# Altium PCB PCB1.PcbDoc
Units mm, origin at the board's own origin, x right, y up, seen from the top; angles counter-clockwise.
Board outline 220 x 90 mm, 2 copper layers (Top Layer, Bottom Layer); 97 components, 216 nets, 528 pads, 0 vias.
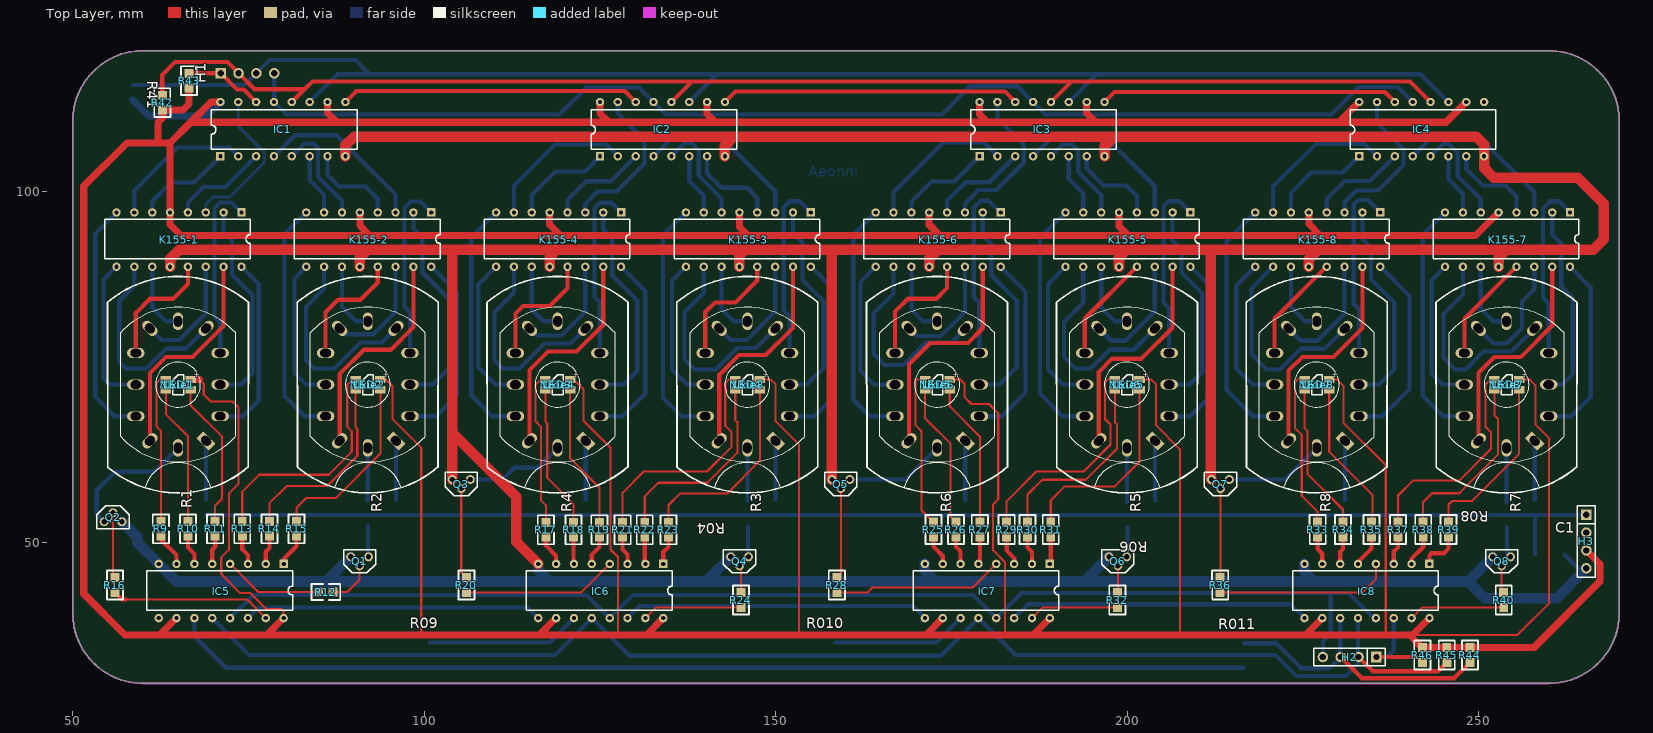
[diagram p0: Top Layer view]
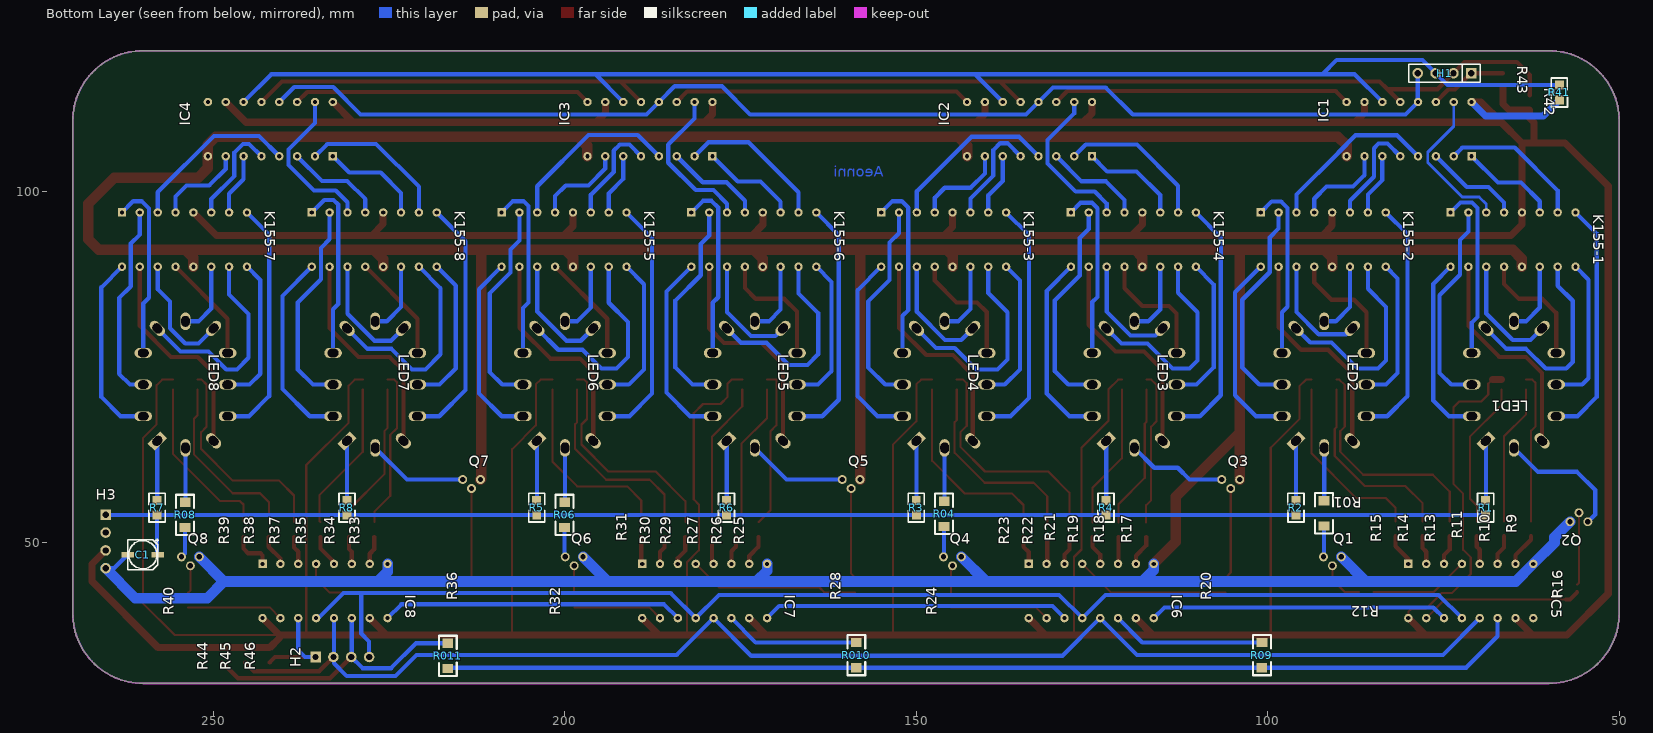
[diagram p1: Bottom Layer view, seen from below]
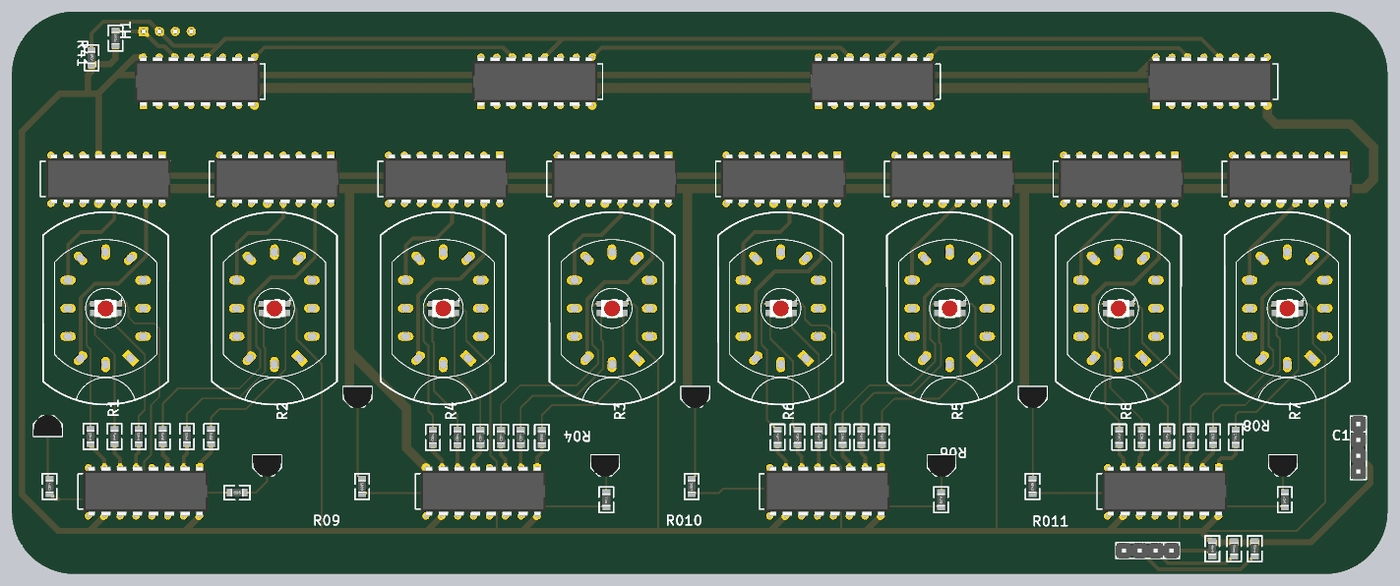
[diagram p2: 3D render of the assembled board from above, using the file's embedded part models]
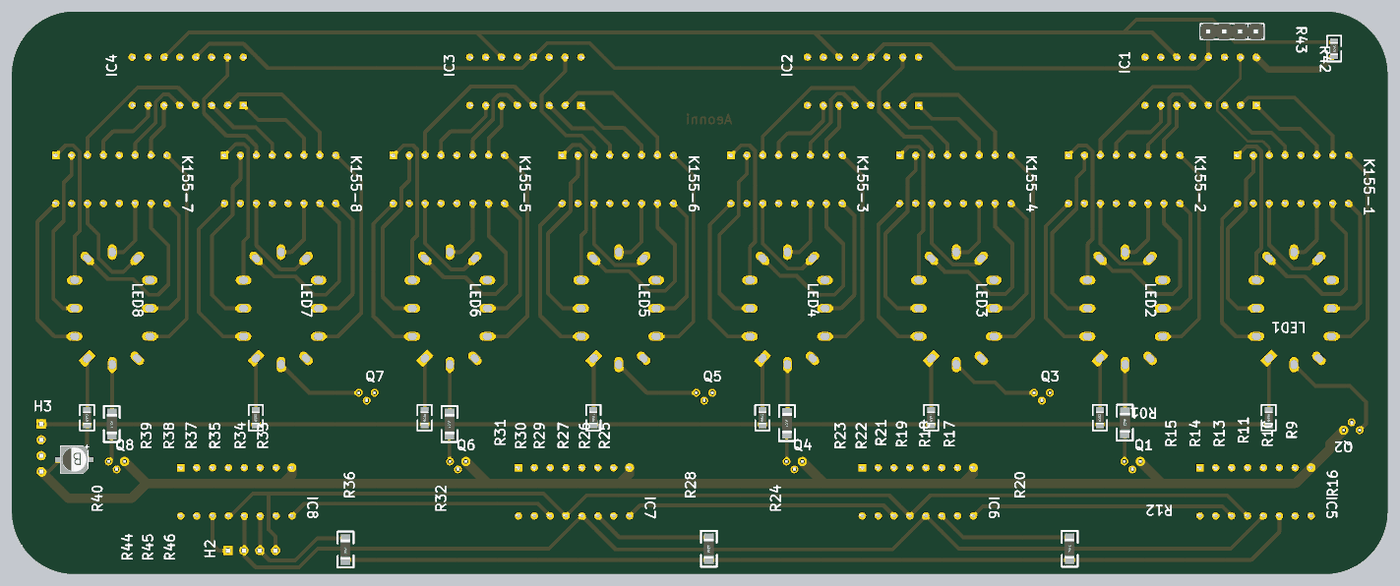
[diagram p3: 3D render of the assembled board from below, using the file's embedded part models]

## Layer stack, top to bottom
Top Solder: solder mask 0.0102, Solder Resist, Dk 3.5
Top Layer: signal copper 0.0356
Dielectric 1: dielectric 0.32, FR-4, Dk 4.8
Bottom Layer: signal copper 0.0356
Bottom Solder: solder mask 0.0102, Solder Resist, Dk 3.5

## Board outline
50,40 50,110 cw(c60,110) 60,120 260,120 cw(c260,110) 270,110 270,40 cw(c260,40) 260,30 60,30 cw(c60,40)

## Design rules (kind name [scope] priority, off if disabled: settings)
Clearance [All] p1: gap=0.3
PolygonConnect [All] p1: connectstyle=Relief reliefconductorwidth=0.254 reliefentries=4 polygonreliefangle="90 Angle" airgapwidth=0.254
RoutingVias [All] p1: holewidth=0.711 width=1.27 viastyle="Through Hole" minholewidth=0.711 minwidth=1.27 maxholewidth=10 maxwidth=10
SolderMaskExpansion [All] p1: expansion=0.102
Width [All] p1: maxlimit=2 minlimit=0.3 preferedwidth=0.6 minimp=50.000000 maximp=50.000000 favimp=50.000000
30 further rules are at their usual default settings.

## Components (designator, comment, footprint, x,y, rotation, side; value= is the part's Value field where it differs from the comment)
C1 "16V 220uF" ED4 260.045,48.311 r0 bottom
H1 "Header" HDR1X4 71.044,116.815 r0 bottom
H2 "Header" HDR1X4 235.458,33.757 r180 top
H3 "Header" HDR1X4 265.328,54 r270 top
IC1 "74HC595" DIP16 71,105 r90 top
IC2 "74HC595" DIP16 125,105 r90 top
IC3 "74HC595" DIP16 179,105 r90 top
IC4 "74HC595" DIP16 233,105 r90 top
IC5 "74HC595" DIP16 80,47 r270 top
IC6 "74HC595" DIP16 134,47 r270 top
IC7 "74HC595" DIP16 189,47 r270 top
IC8 "74HC595" DIP16 243,47 r270 top
K155-1 "K155ID1" DIP16 74,97 r270 top
K155-2 "K155ID1" DIP16 101,97 r270 top
K155-3 "K155ID1" DIP16 155,97 r270 top
K155-4 "K155ID1" DIP16 128,97 r270 top
K155-5 "K155ID1" DIP16 209,97 r270 top
K155-6 "K155ID1" DIP16 182,97 r270 top
K155-7 "K155ID1" DIP16 263,97 r270 top
K155-8 "K155ID1" DIP16 236,97 r270 top
LED1 "LED-RGB" LED3528-4 65,72.5 r0 top
LED2 "LED-RGB" LED3528-4 92,72.5 r0 top
LED3 "LED-RGB" LED3528-4 119,72.5 r0 top
LED4 "LED-RGB" LED3528-4 146,72.5 r0 top
LED5 "LED-RGB" LED3528-4 173,72.5 r0 top
LED6 "LED-RGB" LED3528-4 200,72.5 r0 top
LED7 "LED-RGB" LED3528-4 227,72.5 r0 top
LED8 "LED-RGB" LED3528-4 254,72.5 r0 top
Nixie1 "IN-12" IN-12 65,72.507 r0 top
Nixie2 "IN-12" IN-12 92,72.507 r0 top
Nixie3 "IN-12" IN-12 146,72.507 r0 top
Nixie4 "IN-12" IN-12 119,72.507 r0 top
Nixie5 "IN-12" IN-12 200,72.507 r0 top
Nixie6 "IN-12" IN-12 173,72.507 r0 top
Nixie7 "IN-12" IN-12 254,72.507 r0 top
Nixie8 "IN-12" IN-12 227,72.507 r0 top
Q1 "NPN" TO92A 89.535,48 r180 top
Q2 "NPN" TO92A 57,53 r0 top
Q3 "NPN" TO92A 104,59 r180 top
Q4 "NPN" TO92A 143.586,48 r180 top
Q5 "NPN" TO92A 158,59 r180 top
Q6 "NPN" TO92A 197.409,48 r180 top
Q7 "NPN" TO92A 212,59 r180 top
Q8 "NPN" TO92A 251.993,48 r180 top
R1 "1K" R0805 69,55 r90 bottom
R01 "JUMPER" R0 92,54.2 r90 bottom
R2 "1K" R0805 96,55 r90 bottom
R3 "1K" R0805 150,55 r90 bottom
R4 "1K" R0805 123,55 r90 bottom
R04 "JUMPER" R0 146.05,54.127 r90 bottom
R5 "1K" R0805 204,55 r90 bottom
R6 "1K" R0805 177,55 r90 bottom
R06 "JUMPER" R0 200.025,53.975 r90 bottom
R7 "1K" R0805 258,55 r90 bottom
R8 "1K" R0805 231,55 r90 bottom
R08 "JUMPER" R0 254.025,53.975 r90 bottom
R09 "JUMPER" R0 100.838,34.036 r270 bottom
R9 "1K" R0805 62.535,51.994 r90 top
R010 "JUMPER" R0 158.547,34.036 r270 bottom
R10 "1K" R0805 66.396,51.994 r90 top
R011 "JUMPER" R0 216.662,33.909 r270 bottom
R11 "1K" R0805 70.256,51.994 r90 top
R12 "1K" R0805 86,43 r0 top
R13 "1K" R0805 74.117,51.994 r90 top
R14 "1K" R0805 77.978,51.994 r90 top
R15 "1K" R0805 81.839,51.994 r90 top
R16 "1K" R0805 56,44 r90 top
R17 "1K" R0805 117.297,51.867 r90 top
R18 "1K" R0805 121.234,51.867 r90 top
R19 "1K" R0805 124.917,51.867 r90 top
R20 "1K" R0805 106,44 r90 top
R21 "1K" R0805 128.219,51.867 r90 top
R22 "1K" R0805 131.369,51.867 r90 top
R23 "1K" R0805 134.747,51.867 r90 top
R24 "1K" R0805 145.059,41.859 r90 top
R25 "1K" R0805 172.441,51.892 r90 top
R26 "1K" R0805 175.641,51.892 r90 top
R27 "1K" R0805 179.045,51.892 r90 top
R28 "1K" R0805 158.699,44 r90 top
R29 "1K" R0805 182.855,51.892 r90 top
R30 "1K" R0805 185.826,51.892 r90 top
R31 "1K" R0805 189.128,51.892 r90 top
R32 "1K" R0805 198.603,41.859 r90 top
R33 "1K" R0805 227.101,51.892 r90 top
R34 "1K" R0805 230.708,51.892 r90 top
R35 "1K" R0805 234.747,51.892 r90 top
R36 "1K" R0805 213.233,44 r90 top
R37 "1K" R0805 238.531,51.892 r90 top
R38 "1K" R0805 242.113,51.892 r90 top
R39 "1K" R0805 245.72,51.892 r90 top
R40 "1K" R0805 253.568,41.859 r90 top
R41 "1K" R0805 58.522,114.071 r270 bottom
R42 "1K" R0805 62.738,112.624 r270 top
R43 "1K" R0805 66.548,115.748 r270 top
R44 "1K" R0805 248.768,34.036 r90 top
R45 "1K" R0805 245.466,34.036 r90 top
R46 "1K" R0805 241.986,34.036 r90 top

## Footprints (in the part's own frame and the unit in brackets; to place one, negate y for a bottom-side part, rotate by r counter-clockwise, add the part's x,y. Pads: shape width x height; smd on the part's side, far side on the other; paste and mask are expansions set on the pad)
DIP16 [mm]
  rect 1.2x1.2 hole 0.6: 1(0,0)
  round 1.2 hole 0.6: 2(0,-2.54) 3(0,-5.08) 4(0,-7.62) 5(0,-10.16) 6(0,-12.7) 7(0,-15.24) 8(0,-17.78) 9(7.714,-17.78) 10(7.714,-15.24) 11(7.714,-12.7) 12(7.714,-10.16) 13(7.714,-7.62) 14(7.714,-5.08) 15(7.714,-2.54) 16(7.714,0)
  silkscreen extent 0.97,-19.46 6.61,1.27, body extent -0.17,-18.63 7.7,1.37, height 5.08
ED4 [mm] "4X4X5.5"
  rect 1.8x0.8 smd: 1(-2.15,0) 2(2.15,0)
  silkscreen extent -2.29,-2.29 2.15,2.15, body extent -2.29,-2.16 2.31,2.14, height 5.2
HDR1X4 [mm] "Connector; Header; 4 Position"
  rect 1.5x1.5 hole 0.9: 1(0,0)
  round 1.5 hole 0.9: 2(2.54,0) 3(5.08,0) 4(7.62,0)
  silkscreen extent -1.27,-1.27 8.89,1.27, body extent -1.26,-1.27 8.9,1.27, height 8.54
IN-12 [mm] "IN-12 Nixie"
  rect 2.5x1.4 hole 1.2 slot 1.5 at 135 deg rot 135: 1(3.969,-8)
  oval 2.5x1.4 hole 1.2 slot 1.5 at 0 deg: 2(5.969,-4.5) 3(5.969,0) 4(5.969,4.5) 8(-6.031,4.5) 9(-6.031,0) 10(-6.031,-4.5)
  oval 2.5x1.4 hole 1.2 slot 1.5 at 45 deg rot 45: 5(3.969,8) 11(-4.031,-8)
  oval 1.4x2.5 hole 1.2 slot 1.5 at 90 deg: 6(-0.031,9) 12(-0.031,-9)
  oval 2.5x1.4 hole 1.2 slot 1.5 at 135 deg rot 135: 7(-4.031,8)
  silkscreen extent -10.07,-15.4 9.98,15.4, body extent -8.38,-2.54 6.86,12.57, height 19
LED3528-4 [mm]
  rect 1.5x1 smd: 1(-1.753,0.724) 2(1.753,0.724) 3(-1.753,-0.724) 4(1.753,-0.724)
  silkscreen extent -0.76,-1.44 0.76,1.41, body extent -1.78,-1.41 1.72,1.39, height 1.8
R0 [mil] "1/4W"
  rect 51.18x60 smd: 1(-70.87,0.5)
  rect 52.13x60 smd: 2(70.87,-0.5)
  silkscreen extent -113,-50 113,50, body extent -63,-32 63,31, height 24
R0805 [mm] "1/8W"
  rect 1.27x1.27 smd: 1(-1.045,-0.003) 2(1.045,0.003)
  silkscreen extent -2.06,-1.15 2.05,1.15, body extent -1.01,-0.62 0.99,0.64, height 0.55
TO92A [mil] "7805/7809/LP2950电源芯片（未加焊）"
  round 50 hole 30: 1(0,0) 2(-50,50) 3(-100,0)
  silkscreen extent -140,-40 40,90, body extent -139,-38 39,96, height 269

## Part data
C1: library part CAP-POL-SMD, "贴片电容（有极性）"
H1 H2 H3: library part Header-4
IC1 IC2 IC3 IC4 IC5 IC6 IC7 IC8: "8-bit移位寄存器"
LED1 LED2 LED3 LED4 LED5 LED6 LED7 LED8: "彩色LED"
Q1 Q2 Q3 Q4 Q5 Q6 Q7 Q8: "NPN三极管"
R1 R2 R3 R4 R5 R6 R7 R8 R9 R10 R11 R12 R13 R14 R15 R16 R17 R18 R19 R20 R21 R22 R23 R24 R25 R26 R27 R28 R29 R30 R31 R32 R33 R34 R35 R36 R37 R38 R39 R40 R41 R42 R43 R44 R45 R46: library part RES, "电阻"
R01 R04 R06 R08 R09 R010 R011: library part R0, "跳线-贴片"

## Nets (pads, with @x,y where several pads share a name; then routed paths per layer and width w, separated by ;. In a path a pad name is that pad's centre, name@x,y a point inside that pad or via, vN(x,y) a via of type N, cw(c..) or ccw(c..) an arc to the next point about the centre after c; other vN are vias at no path point)
GND: C1.2 H3.4 IC1.8 IC2.8 IC3.8 IC4.8 IC5.8 IC6.8 IC7.8 IC8.8 K155-1.12 K155-2.12 K155-3.12 K155-4.12 K155-5.12 K155-6.12 K155-7.12 K155-8.12 Q1.1 Q2.1 Q3.1 Q4.1 Q5.1 Q6.1 Q7.1 Q8.1 | length 795.1
  Top Layer w1.5: K155-1.12 63.84,90.383 65.151,91.694 91.948,91.694 ; IC1.8 88.78,106.535 90.018,107.772 144.043,107.772 ; K155-2.12 90.84,90.586 91.948,91.694 ; Q3.1 104,65.634 ; IC6.8 113.081,50.139 113.081,56.553 104,65.634 ; K155-4.12 117.84,90.662 118.872,91.694 ; IC2.8 142.78,106.509 144.043,107.772 ; K155-3.12 144.84,90.865 145.669,91.694 ; Q5.1 158,91.657 157.963,91.694 ; K155-6.12 171.84,90.433 173.101,91.694 ; IC3.8 196.78,106.458 198.095,107.772 ; K155-5.12 198.84,90.636 199.898,91.694 ; Q7.1 211.912,59.088 211.912,91.694 ; K155-8.12 225.84,90.331 227.203,91.694 ; K155-7.12 252.84,90.534 254,91.694 ; 91.948,91.694 103.607,91.694 ; 103.607,91.694 118.872,91.694 ; 103.607,91.694 104,91.301 104,65.634 ; 118.872,91.694 145.669,91.694 ; 144.043,107.772 198.095,107.772 ; 145.669,91.694 157.963,91.694 ; 157.963,91.694 173.101,91.694 ; 173.101,91.694 199.898,91.694 ; 198.095,107.772 249.657,107.772 250.78,106.649 IC4.8 250.78,103.321 252.146,101.956 264.109,101.956 267.818,98.247 267.818,93.193 266.319,91.694 254,91.694 ; 199.898,91.694 211.912,91.694 ; 211.912,91.694 227.203,91.694 ; 227.203,91.694 254,91.694
  Bottom Layer w0.6: C1.2 264.126,46.38 H3.4
  Bottom Layer w1.5: Q2.1 59.207,50.793 59.207,50.013 IC5.8 64.719,44.501 86.036,44.501 ; Q1.1 86.036,44.501 ; IC6.8 116.22,46.137 117.856,44.501 ; Q4.1 140.087,44.501 ; IC7.8 171.22,46.052 172.771,44.501 ; Q6.1 193.91,44.501 ; IC8.8 225.22,45.874 226.593,44.501 ; Q8.1 248.494,44.501 ; H3.4 261.087,42.139 250.856,42.139 248.494,44.501 ; 86.036,44.501 117.856,44.501 ; 117.856,44.501 140.087,44.501 ; 140.087,44.501 172.771,44.501 ; 172.771,44.501 193.91,44.501 ; 193.91,44.501 226.593,44.501 ; 226.593,44.501 248.494,44.501
NetIC1_1: IC1.1 K155-1.6 | length 13.9
  Bottom Layer w0.6: K155-1.6 61.3,98.587 63.957,101.244 67.244,101.244 IC1.1
NetIC1_2: IC1.2 K155-1.7 | length 20.9
  Bottom Layer w0.6: K155-1.7 58.76,100.111 64.872,106.223 72.317,106.223 IC1.2
NetIC1_3: IC1.3 K155-1.4 | length 13.8
  Bottom Layer w0.6: K155-1.4 66.38,98.409 68.58,100.609 71.689,100.609 IC1.3
NetIC1_4: IC1.4 K155-2.3 | length 24.6
  Bottom Layer w0.6: IC1.4 81.595,107.975 87.502,107.975 89.98,105.497 89.98,105.473 95.92,99.533 K155-2.3
NetIC1_5: IC1.5 K155-2.6 | length 15.3
  Bottom Layer w0.6: IC1.5 82.956,106.796 84.237,106.796 84.9,106.133 84.9,104.503 84.887,104.49 84.887,102.083 88.3,98.669 K155-2.6
NetIC1_6: IC1.6 K155-2.7 | length 8.9
  Bottom Layer w0.6: IC1.6 83.7,101.618 85.76,99.558 K155-2.7
NetIC1_7: IC1.7 K155-2.4 | length 13.2
  Bottom Layer w0.6: IC1.7 86.24,102.304 87.859,100.686 91.643,100.686 93.38,98.949 K155-2.4
NetIC1_9: IC1.9 IC2.14 | length 42.6
  Top Layer w0.6: IC1.9 90.341,114.275 128.519,114.275 IC2.14
NetIC1_15: IC1.15 K155-1.3 | length 22.1
  Bottom Layer w0.4: K155-1.3 68.92,98.206 69.926,99.212 72.339,99.212 77.241,104.115 77.241,105.562 73.54,109.264 IC1.15
NetIC2_1: IC2.1 K155-4.6 | length 14.5
  Bottom Layer w0.6: K155-4.6 115.3,99.476 118.669,102.845 122.845,102.845 IC2.1
NetIC2_2: IC2.2 K155-4.7 | length 21.7
  Bottom Layer w0.6: K155-4.7 112.76,100.797 118.618,106.655 125.885,106.655 IC2.2
NetIC2_3: IC2.3 K155-4.4 | length 14.1
  Bottom Layer w0.6: K155-4.4 120.38,98.79 123.012,101.422 126.502,101.422 IC2.3
NetIC2_4: IC2.4 K155-3.3 | length 24.7
  Bottom Layer w0.6: IC2.4 135.392,107.772 142.164,107.772 149.92,100.016 K155-3.3
NetIC2_5: IC2.5 K155-3.6 | length 15.3
  Bottom Layer w0.6: IC2.5 137.018,106.858 138.049,106.858 139.04,105.867 139.04,102.26 142.3,99 K155-3.6
NetIC2_6: IC2.6 K155-3.7 | length 8.9
  Bottom Layer w0.6: IC2.6 137.7,101.492 139.76,99.432 K155-3.7
NetIC2_7: IC2.7 K155-3.4 | length 13.1
  Bottom Layer w0.6: IC2.7 140.24,102.533 142.265,100.508 145.948,100.508 147.38,99.076 K155-3.4
NetIC2_9: IC2.9 IC3.14 | length 42.5
  Top Layer w0.6: IC2.9 144.264,114.198 182.596,114.198 IC3.14
NetIC2_15: IC2.15 K155-4.3 | length 22.3
  Bottom Layer w0.6: K155-4.3 122.92,98.282 124.612,99.974 127.33,99.974 131.318,103.962 131.318,107.315 127.54,111.093 IC2.15
NetIC3_1: IC3.1 K155-6.6 | length 13.9
  Bottom Layer w0.6: K155-6.6 169.3,98.536 172.161,101.397 175.397,101.397 IC3.1
NetIC3_2: IC3.2 K155-6.7 | length 21.4
  Bottom Layer w0.6: K155-6.7 166.76,99.882 173.863,106.985 179.555,106.985 IC3.2
NetIC3_3: IC3.3 K155-6.4 | length 14
  Bottom Layer w0.6: K155-6.4 174.38,98.663 177.013,101.295 180.375,101.295 IC3.3
NetIC3_4: IC3.4 K155-5.3 | length 25.3
  Bottom Layer w0.6: IC3.4 189.621,108.001 196.647,108.001 203.92,100.728 K155-5.3
NetIC3_5: IC3.5 K155-5.6 | length 15.1
  Bottom Layer w0.6: IC3.5 190.815,106.655 192.176,106.655 193.04,105.791 193.04,102.768 196.3,99.508 K155-5.6
NetIC3_6: IC3.6 K155-5.7 | length 8.9
  Bottom Layer w0.6: IC3.6 191.7,101.772 193.76,99.712 K155-5.7
NetIC3_7: IC3.7 K155-5.4 | length 12.8
  Bottom Layer w0.6: IC3.7 194.24,103.245 196.647,100.838 199.873,100.838 201.38,99.331 K155-5.4
NetIC3_9: IC3.9 IC4.14 | length 42.5
  Top Layer w0.6: IC3.9 198.214,114.148 236.646,114.148 IC4.14
NetIC3_15: IC3.15 K155-6.3 | length 22.2
  Bottom Layer w0.6: K155-6.3 176.92,98.231 178.867,100.178 181.381,100.178 185.28,104.076 185.28,106.642 181.54,110.382 IC3.15
NetIC4_1: IC4.1 K155-8.6 | length 14.6
  Bottom Layer w0.6: K155-8.6 223.3,99.78 226.187,102.667 230.667,102.667 IC4.1
NetIC4_2: IC4.2 K155-8.7 | length 21.7
  Bottom Layer w0.6: K155-8.7 220.76,100.669 226.847,106.756 233.784,106.756 IC4.2
NetIC4_3: IC4.3 K155-8.4 | length 14.1
  Bottom Layer w0.6: K155-8.4 228.38,98.891 230.962,101.473 234.553,101.473 IC4.3
NetIC4_4: IC4.4 K155-7.3 | length 24.7
  Bottom Layer w0.6: IC4.4 243.494,107.874 249.911,107.874 257.92,99.864 K155-7.3
NetIC4_5: IC4.5 K155-7.6 | length 15
  Bottom Layer w0.6: IC4.5 244.916,106.756 245.77,106.756 247.015,105.512 247.015,102.184 250.3,98.899 K155-7.6
NetIC4_6: IC4.6 K155-7.7 | length 8.9
  Bottom Layer w0.6: IC4.6 245.7,101.721 247.76,99.661 K155-7.7
NetIC4_7: IC4.7 K155-7.4 | length 12.8
  Bottom Layer w0.6: IC4.7 248.24,103.194 250.596,100.838 253.822,100.838 255.38,99.28 K155-7.4
NetIC4_15: IC4.15 K155-8.3 | length 22.6
  Bottom Layer w0.6: K155-8.3 230.92,98.459 232.588,100.127 235.687,100.127 239.319,103.759 239.319,105.943 235.54,109.722 IC4.15
NetIC5_1: IC5.1 R15.1 | length 4.7
  Top Layer w0.6: IC5.1 80,47.666 81.841,49.507 R15.1
NetIC5_2: IC5.2 R14.1 | length 4.2
  Top Layer w0.6: IC5.2 77.46,48.733 77.981,49.253 R14.1
NetIC5_3: IC5.3 R13.1 | length 4.3
  Top Layer w0.6: R13.1 74.12,49.07 74.92,48.27 IC5.3
NetIC5_4: IC5.4 R12.1 | length 14.2
  Top Layer w0.3: IC5.4 76.383,42.997 R12.1
NetIC5_5: IC5.5 R11.1 | length 4.1
  Top Layer w0.6: IC5.5 69.84,49.012 70.259,49.431 R11.1
NetIC5_6: IC5.6 R10.1 | length 4.3
  Top Layer w0.6: R10.1 66.398,49.324 67.3,48.422 IC5.6
NetIC5_7: IC5.7 R9.1 | length 4.9
  Top Layer w0.6: R9.1 62.56,50.926 62.56,50.444 64.76,48.245 IC5.7
NetIC5_11: IC5.11 R09.2 R010.2 R011.2 | length 153.7
  Bottom Layer w0.6: IC5.11 67.3,36.713 71.777,32.236 R09.2 R010.2 R011.2@216.548,32.236
NetIC5_14: IC5.14 IC6.9 | length 42.6
  Bottom Layer w0.6: IC5.14 76.452,40.818 114.688,40.818 IC6.9
NetIC5_15: IC5.15 R16.1 | length 23
  Top Layer w0.3: 57.556,41.955 74.791,41.955 IC5.15
  Top Layer w0.6: R16.1 57.003,41.955 57.556,41.955
NetIC6_1: IC6.1 R23.1 | length 4.1
  Top Layer w0.6: IC6.1 134,48.681 134.75,49.431 R23.1
NetIC6_2: IC6.2 R22.1 | length 3.9
  Top Layer w0.6: R22.1 131.371,47.089 IC6.2
NetIC6_3: IC6.3 R21.1 | length 4.1
  Top Layer w0.6: R21.1 128.222,49.045 128.92,48.347 IC6.3
NetIC6_4: IC6.4 R20.1 | length 22.1
  Top Layer w0.3: R20.1 122.335,42.955 IC6.4
NetIC6_5: IC6.5 R19.1 | length 4.3
  Top Layer w0.6: IC6.5 123.84,48.351 124.92,49.431 R19.1
NetIC6_6: IC6.6 R18.1 | length 3.8
  Top Layer w0.6: R18.1 121.237,47.063 IC6.6
NetIC6_7: IC6.7 R17.1 | length 4.4
  Top Layer w0.6: R17.1 117.3,49.629 118.76,48.169 IC6.7
NetIC6_11: IC6.11 R09.1 | length 21.9
  Bottom Layer w0.6: R09.1 117.85,35.836 IC6.11
NetIC6_14: IC6.14 IC7.9 | length 43.7
  Bottom Layer w0.6: IC6.14 130.63,40.996 169.51,40.996 IC7.9
NetIC6_15: IC6.15 R24.1 | length 14.2
  Top Layer w0.3: IC6.15 132.988,40.814 R24.1
NetIC7_1: IC7.1 R31.1 | length 3.9
  Top Layer w0.6: IC7.1 189.131,47.131 R31.1
NetIC7_2: IC7.2 R30.1 | length 4.1
  Top Layer w0.6: R30.1 185.829,49.35 186.46,48.719 IC7.2
NetIC7_3: IC7.3 R29.1 | length 4.3
  Top Layer w0.6: R29.1 182.857,48.918 183.92,47.855 IC7.3
NetIC7_4: IC7.4 R28.1 | length 24.4
  Top Layer w0.3: R28.1 163.097,42.955 163.779,43.637 178.017,43.637 IC7.4
NetIC7_5: IC7.5 R27.1 | length 3.9
  Top Layer w0.6: IC7.5 179.047,47.207 R27.1
NetIC7_6: IC7.6 R26.1 | length 4.1
  Top Layer w0.6: R26.1 175.644,49.451 176.3,48.795 IC7.6
NetIC7_7: IC7.7 R25.1 | length 4.4
  Top Layer w0.6: R25.1 172.443,49.451 173.76,48.134 IC7.7
NetIC7_11: IC7.11 R010.1 | length 19.2
  Bottom Layer w0.6: R010.1 172.85,35.836 IC7.11
NetIC7_14: IC7.14 IC8.9 | length 42.9
  Bottom Layer w0.6: IC7.14 185.884,41.25 223.256,41.25 IC8.9
NetIC7_15: IC7.15 R32.1 | length 12.8
  Top Layer w0.3: IC7.15 187.988,40.814 R32.1
NetIC8_1: IC8.1 R39.1 | length 6
  Top Layer w0.6: IC8.1 243,48.207 243.307,48.514 245.059,48.514 245.722,49.177 R39.1
NetIC8_2: IC8.2 R38.1 | length 4.5
  Top Layer w0.6: IC8.2 240.46,47.776 242.115,49.431 R38.1
NetIC8_3: IC8.3 R37.1 | length 4.1
  Top Layer w0.6: IC8.3 237.92,48.741 238.534,49.355 R37.1
NetIC8_4: IC8.4 R36.1 | length 25.1
  Top Layer w0.3: R36.1 233.502,42.955 235.38,44.833 IC8.4
NetIC8_5: IC8.5 R35.1 | length 4.6
  Top Layer w0.6: IC8.5 232.84,47.268 234.749,49.177 R35.1
NetIC8_6: IC8.6 R34.1 | length 4
  Top Layer w0.6: IC8.6 230.3,48.715 230.711,49.126 R34.1
NetIC8_7: IC8.7 R33.1 | length 4.1
  Top Layer w0.6: R33.1 227.104,49.096 227.76,48.44 IC8.7
NetIC8_15: IC8.15 R40.1 | length 13.7
  Top Layer w0.3: IC8.15 241.988,40.814 R40.1
NetK155-1_1: K155-1.1 Nixie1.4 | length 25.7
  Bottom Layer w0.6: Nixie1.4 70.969,81.355 70.18,82.144 70.18,97.638 70.942,98.4 72.6,98.4 K155-1.1
NetK155-1_2: K155-1.2 Nixie1.3 | length 29.8
  Bottom Layer w0.6: Nixie1.3 73.904,72.507 75.554,74.157 75.554,85.206 75.565,85.217 72.644,88.138 72.644,88.773 72.66,88.789 72.66,89.783 72.644,89.799 72.644,93.091 71.46,94.275 K155-1.2
NetK155-1_8: K155-1.8 Nixie1.10 | length 34.4
  Bottom Layer w0.6: K155-1.8 53.213,93.993 53.213,70.739 55.945,68.007 Nixie1.10
NetK155-1_9: K155-1.9 Nixie1.9 | length 21.6
  Bottom Layer w0.6: K155-1.9 54.356,87.422 54.356,73.406 55.255,72.507 Nixie1.9
NetK155-1_10: K155-1.10 Nixie1.5 | length 29.6
  Bottom Layer w0.6: K155-1.10 58.76,86.573 56.617,84.43 56.617,75.717 57.531,74.803 60.452,74.803 63.246,77.597 66.059,77.597 Nixie1.5
NetK155-1_11: K155-1.11 Nixie1.6 | length 10.3
  Bottom Layer w0.6: K155-1.11 61.3,83.48 63.273,81.507 Nixie1.6
NetK155-1_13: K155-1.13 Nixie1.8 | length 17.3
  Top Layer w0.6: Nixie1.8 58.969,82.718 60.96,84.709 64.262,84.709 66.38,86.827 K155-1.13
NetK155-1_14: K155-1.14 Nixie1.7 | length 16.8
  Bottom Layer w0.6: Nixie1.7 62.609,78.867 65.151,78.867 68.92,82.636 K155-1.14
NetK155-1_15: K155-1.15 Nixie1.11 | length 31.4
  Top Layer w0.6: Nixie1.11 60.969,74.177 63.246,76.454 67.056,76.454 71.46,80.858 K155-1.15
NetK155-1_16: K155-1.16 Nixie1.2 | length 26.5
  Bottom Layer w0.6: Nixie1.2 74.23,68.007 76.465,70.242 76.465,85.59 76.454,85.601 76.454,86.832 K155-1.16
NetK155-2_1: K155-2.1 Nixie2.4 | length 25.8
  Bottom Layer w0.6: Nixie2.4 97.969,82.803 97.18,83.591 97.18,97.638 98.095,98.552 99.448,98.552 K155-2.1
NetK155-2_2: K155-2.2 Nixie2.3 | length 30.9
  Bottom Layer w0.6: Nixie2.3 101.209,72.507 103.632,74.93 103.632,84.582 99.72,88.494 99.72,93.447 98.46,94.707 K155-2.2
NetK155-2_8: K155-2.8 Nixie2.10 | length 34.4
  Bottom Layer w0.6: K155-2.8 80.137,93.917 80.137,70.866 82.996,68.007 Nixie2.10
NetK155-2_9: K155-2.9 Nixie2.9 | length 20.9
  Bottom Layer w0.6: K155-2.9 81.534,87.6 81.534,74.168 83.195,72.507 Nixie2.9
NetK155-2_10: K155-2.10 Nixie2.5 | length 30
  Bottom Layer w0.6: K155-2.10 85.76,86.141 83.185,83.566 83.185,75.946 84.328,74.803 87.249,74.803 90.932,78.486 93.948,78.486 Nixie2.5
NetK155-2_11: K155-2.11 Nixie2.6 | length 10.3
  Bottom Layer w0.6: K155-2.11 88.3,83.531 90.324,81.507 Nixie2.6
NetK155-2_13: K155-2.13 Nixie2.8 | length 17.2
  Top Layer w0.6: Nixie2.8 85.969,82.794 87.757,84.582 90.932,84.582 93.38,87.03 K155-2.13
NetK155-2_14: K155-2.14 Nixie2.7 | length 16.1
  Bottom Layer w0.6: Nixie2.7 88.819,79.657 92.738,79.657 95.92,82.839 K155-2.14
NetK155-2_15: K155-2.15 Nixie2.11 | length 31.4
  Top Layer w0.6: Nixie2.11 87.969,73.999 91.44,77.47 95.25,77.47 98.46,80.68 K155-2.15
NetK155-2_16: K155-2.16 Nixie2.2 | length 27.7
  Bottom Layer w0.6: Nixie2.2 101.662,68.007 104.648,70.993 104.648,85.638 K155-2.16
NetK155-3_1: K155-3.1 Nixie3.4 | length 25.9
  Bottom Layer w0.6: Nixie3.4 151.969,82.295 151.13,83.134 151.13,97.663 152.07,98.603 153.397,98.603 K155-3.1
NetK155-3_2: K155-3.2 Nixie3.3 | length 29.8
  Bottom Layer w0.6: Nixie3.3 154.422,72.507 156.845,74.93 156.845,84.328 153.797,87.376 153.797,92.71 152.46,94.047 K155-3.2
NetK155-3_8: K155-3.8 Nixie3.10 | length 34.8
  Bottom Layer w0.6: K155-3.8 133.985,93.765 133.985,70.612 136.59,68.007 Nixie3.10
NetK155-3_9: K155-3.9 Nixie3.9 | length 21
  Bottom Layer w0.6: K155-3.9 135.255,87.321 135.255,74.676 137.424,72.507 Nixie3.9
NetK155-3_10: K155-3.10 Nixie3.5 | length 30.3
  Bottom Layer w0.6: K155-3.10 139.76,85.531 137.033,82.804 137.033,76.073 138.43,74.676 141.478,74.676 144.526,77.724 147.186,77.724 Nixie3.5
NetK155-3_11: K155-3.11 Nixie3.6 | length 10.4
  Bottom Layer w0.6: K155-3.11 142.3,83.252 144.045,81.507 Nixie3.6
NetK155-3_13: K155-3.13 Nixie3.8 | length 17.1
  Top Layer w0.6: Nixie3.8 139.969,82.819 141.351,84.201 144.265,84.201 147.38,87.316 K155-3.13
NetK155-3_14: K155-3.14 Nixie3.7 | length 16.7
  Bottom Layer w0.6: Nixie3.7 143.609,78.867 145.923,78.867 149.92,82.864 K155-3.14
NetK155-3_15: K155-3.15 Nixie3.11 | length 31.4
  Top Layer w0.6: Nixie3.11 141.969,73.897 144.78,76.708 148.59,76.708 152.46,80.578 K155-3.15
NetK155-3_16: K155-3.16 Nixie3.2 | length 27.4
  Bottom Layer w0.6: Nixie3.2 155.51,68.007 158.369,70.866 158.369,85.917 K155-3.16
NetK155-4_1: K155-4.1 Nixie4.4 | length 25.6
  Bottom Layer w0.6: Nixie4.4 124.969,84.251 124.231,84.988 124.231,97.593 125.013,98.374 126.626,98.374 K155-4.1
NetK155-4_2: K155-4.2 Nixie4.3 | length 30.7
  Bottom Layer w0.6: Nixie4.3 128.387,72.507 130.302,74.422 130.302,84.455 126.746,88.011 126.746,93.345 125.46,94.631 K155-4.2
NetK155-4_8: K155-4.8 Nixie4.10 | length 35
  Bottom Layer w0.6: K155-4.8 106.68,93.46 106.68,70.993 109.666,68.007 Nixie4.10
NetK155-4_9: K155-4.9 Nixie4.9 | length 21.7
  Bottom Layer w0.6: K155-4.9 107.696,86.762 107.696,74.93 110.119,72.507 Nixie4.9
NetK155-4_10: K155-4.10 Nixie4.5 | length 30.3
  Bottom Layer w0.6: K155-4.10 112.76,85.582 109.982,82.804 109.982,75.946 111.125,74.803 113.538,74.803 117.094,78.359 120.821,78.359 Nixie4.5
NetK155-4_11: K155-4.11 Nixie4.6 | length 10.5
  Bottom Layer w0.6: K155-4.11 115.3,83.201 116.994,81.507 Nixie4.6
NetK155-4_13: K155-4.13 Nixie4.8 | length 17.6
  Top Layer w0.6: Nixie4.8 112.969,82.616 114.046,83.693 117.856,83.693 120.38,86.217 K155-4.13
NetK155-4_14: K155-4.14 Nixie4.7 | length 16.2
  Bottom Layer w0.6: Nixie4.7 115.974,79.502 119.507,79.502 122.92,82.915 K155-4.14
NetK155-4_15: K155-4.15 Nixie4.11 | length 31.5
  Top Layer w0.6: Nixie4.11 114.969,74.583 117.602,77.216 121.666,77.216 125.46,81.01 K155-4.15
NetK155-4_16: K155-4.16 Nixie4.2 | length 27.3
  Bottom Layer w0.6: Nixie4.2 128.205,68.007 131.445,71.247 131.445,85.841 K155-4.16
NetK155-5_1: K155-5.1 Nixie5.4 | length 26
  Bottom Layer w0.6: Nixie5.4 205.969,83.388 205.181,84.176 205.181,97.917 205.867,98.603 207.397,98.603 K155-5.1
NetK155-5_2: K155-5.2 Nixie5.3 | length 29.9
  Bottom Layer w0.6: Nixie5.3 208.905,72.507 210.693,74.295 210.693,85.471 207.721,88.443 207.721,91.745 206.46,93.006 K155-5.2
NetK155-5_8: K155-5.8 Nixie5.10 | length 35
  Bottom Layer w0.6: K155-5.8 187.579,93.359 187.579,71.247 190.819,68.007 Nixie5.10
NetK155-5_9: K155-5.9 Nixie5.9 | length 21.8
  Bottom Layer w0.6: K155-5.9 188.722,86.788 188.722,74.676 190.891,72.507 Nixie5.9
NetK155-5_10: K155-5.10 Nixie5.5 | length 30
  Bottom Layer w0.6: K155-5.10 193.76,84.159 191.008,81.407 191.008,76.454 192.659,74.803 194.818,74.803 197.485,77.47 200.932,77.47 Nixie5.5
NetK155-5_11: K155-5.11 Nixie5.6 | length 10.3
  Bottom Layer w0.6: K155-5.11 196.3,83.481 198.274,81.507 Nixie5.6
NetK155-5_13: K155-5.13 Nixie5.8 | length 15.3
  Top Layer w0.6: Nixie5.8 193.969,81.875 K155-5.13
NetK155-5_14: K155-5.14 Nixie5.7 | length 16.8
  Bottom Layer w0.6: Nixie5.7 197.736,78.74 199.771,78.74 203.92,82.889 K155-5.14
NetK155-5_15: K155-5.15 Nixie5.11 | length 31.6
  Top Layer w0.6: Nixie5.11 195.969,74.303 197.866,76.2 202.057,76.2 206.46,80.603 K155-5.15
NetK155-5_16: K155-5.16 Nixie5.2 | length 27
  Bottom Layer w0.6: Nixie5.2 208.977,68.007 212.217,71.247 212.217,86.069 K155-5.16
NetK155-6_1: K155-6.1 Nixie6.4 | length 25.9
  Bottom Layer w0.6: Nixie6.4 178.969,84.15 178.181,84.938 178.181,97.688 179.146,98.654 180.346,98.654 K155-6.1
NetK155-6_2: K155-6.2 Nixie6.3 | length 30.4
  Bottom Layer w0.6: Nixie6.3 181.854,72.507 184.277,74.93 184.277,84.455 180.67,88.062 180.67,92.507 179.46,93.717 K155-6.2
NetK155-6_8: K155-6.8 Nixie6.10 | length 34.9
  Bottom Layer w0.6: K155-6.8 161.036,93.816 161.036,70.358 163.387,68.007 Nixie6.10
NetK155-6_9: K155-6.9 Nixie6.9 | length 21.5
  Bottom Layer w0.6: K155-6.9 162.052,87.118 162.052,74.422 163.967,72.507 Nixie6.9
NetK155-6_10: K155-6.10 Nixie6.5 | length 29.4
  Bottom Layer w0.6: K155-6.10 166.76,85.48 163.957,82.677 163.957,76.835 165.481,75.311 168.148,75.311 171.298,78.461 174.923,78.461 Nixie6.5
NetK155-6_11: K155-6.11 Nixie6.6 | length 10.5
  Bottom Layer w0.6: K155-6.11 169.3,83.176 170.969,81.507 Nixie6.6
NetK155-6_13: K155-6.13 Nixie6.8 | length 17.7
  Top Layer w0.6: Nixie6.8 166.969,82.895 168.783,84.709 172.847,84.709 174.38,86.242 K155-6.13
NetK155-6_14: K155-6.14 Nixie6.7 | length 16.3
  Bottom Layer w0.6: Nixie6.7 170.05,79.426 173.533,79.426 176.92,82.813 K155-6.14
NetK155-6_15: K155-6.15 Nixie6.11 | length 32.3
  Top Layer w0.6: Nixie6.11 168.969,75.395 171.983,78.41 177.343,78.41 179.46,80.527 K155-6.15
NetK155-6_16: K155-6.16 Nixie6.2 | length 27.4
  Bottom Layer w0.6: Nixie6.2 182.18,68.007 185.547,71.374 185.547,85.739 K155-6.16
NetK155-7_1: K155-7.1 Nixie7.4 | length 25.8
  Bottom Layer w0.6: Nixie7.4 259.969,84.049 259.156,84.861 259.156,97.561 260.198,98.603 261.397,98.603 K155-7.1
NetK155-7_2: K155-7.2 Nixie7.3 | length 28.2
  Bottom Layer w0.6: Nixie7.3 261.864,72.507 263.398,74.041 263.398,84.836 261.747,86.487 261.747,92.583 260.46,93.87 K155-7.2
NetK155-7_8: K155-7.8 Nixie7.10 | length 34.5
  Bottom Layer w0.6: K155-7.8 242.062,93.842 242.062,70.866 244.921,68.007 Nixie7.10
NetK155-7_9: K155-7.9 Nixie7.9 | length 21.3
  Bottom Layer w0.6: K155-7.9 243.332,87.398 243.332,74.041 244.866,72.507 Nixie7.9
NetK155-7_10: K155-7.10 Nixie7.5 | length 30.2
  Bottom Layer w0.6: K155-7.10 247.76,85.327 244.983,82.55 244.983,76.327 246.634,74.676 248.158,74.676 250.698,77.216 254.678,77.216 Nixie7.5
NetK155-7_11: K155-7.11 Nixie7.6 | length 10.4
  Bottom Layer w0.6: K155-7.11 250.3,83.329 252.122,81.507 Nixie7.6
NetK155-7_13: K155-7.13 Nixie7.8 | length 15.3
  Top Layer w0.6: Nixie7.8 247.969,81.875 K155-7.13
NetK155-7_14: K155-7.14 Nixie7.7 | length 17.5
  Bottom Layer w0.6: Nixie7.7 252.117,78.359 254,78.359 256.159,80.518 256.159,84.328 257.92,86.089 K155-7.14
NetK155-7_15: K155-7.15 Nixie7.11 | length 31.4
  Top Layer w0.6: Nixie7.11 249.969,74.201 252.222,76.454 256.032,76.454 260.46,80.882 K155-7.15
NetK155-7_16: K155-7.16 Nixie7.2 | length 26.9
  Bottom Layer w0.6: Nixie7.2 263.206,68.007 265.938,70.739 265.938,86.348 K155-7.16
NetK155-8_1: K155-8.1 Nixie8.4 | length 26.2
  Bottom Layer w0.6: Nixie8.4 232.969,83.236 232.232,83.972 232.232,98.12 232.893,98.781 234.219,98.781 K155-8.1
NetK155-8_2: K155-8.2 Nixie8.3 | length 30.1
  Bottom Layer w0.6: Nixie8.3 235.829,72.507 237.998,74.676 237.998,84.201 234.696,87.503 234.696,91.948 233.46,93.184 K155-8.2
NetK155-8_8: K155-8.8 Nixie8.10 | length 35.3
  Bottom Layer w0.6: K155-8.8 214.122,92.902 214.122,71.755 217.87,68.007 Nixie8.10
NetK155-8_9: K155-8.9 Nixie8.9 | length 22
  Bottom Layer w0.6: K155-8.9 215.519,86.585 215.519,74.803 217.815,72.507 Nixie8.9
NetK155-8_10: K155-8.10 Nixie8.5 | length 30.3
  Bottom Layer w0.6: K155-8.10 217.678,86.204 217.678,76.835 219.837,74.676 221.742,74.676 224.663,77.597 228.059,77.597 Nixie8.5
NetK155-8_11: K155-8.11 Nixie8.6 | length 10.3
  Bottom Layer w0.6: K155-8.11 223.3,83.532 225.325,81.507 Nixie8.6
NetK155-8_13: K155-8.13 Nixie8.8 | length 15.3
  Top Layer w0.6: Nixie8.8 220.969,81.875 K155-8.13
NetK155-8_14: K155-8.14 Nixie8.7 | length 17
  Bottom Layer w0.6: Nixie8.7 224.736,78.74 227.076,78.74 230.92,82.584 K155-8.14
NetK155-8_15: K155-8.15 Nixie8.11 | length 31.7
  Top Layer w0.6: Nixie8.11 222.969,74.506 224.917,76.454 229.362,76.454 233.46,80.552 K155-8.15
NetK155-8_16: K155-8.16 Nixie8.2 | length 27.9
  Bottom Layer w0.6: Nixie8.2 236.282,68.007 240.157,71.882 240.157,85.129 K155-8.16
NetLED1_1: LED1.1 R9.2 | length 21.5
  Top Layer w0.3: R9.2 62.532,65.941 61.9,66.573 61.9,72.746 62.378,73.224 LED1.1
NetLED1_3: LED1.3 R10.2 | length 20
  Top Layer w0.3: LED1.3 63.247,68.299 66.393,65.154 R10.2
NetLED1_4: LED1.4 R11.2 | length 21
  Top Layer w0.3: LED1.4 66.753,69.569 71.247,65.075 71.247,56.312 70.254,55.319 R11.2
NetLED2_1: LED2.1 R13.2 | length 33.4
  Top Layer w0.3: R13.2 74.115,57.274 76.53,59.69 86.411,59.69 89.687,62.967 89.687,65.888 89.047,66.528 89.047,72.462 89.809,73.224 LED2.1
NetLED2_3: LED2.3 R14.2 | length 27.4
  Top Layer w0.3: R14.2 77.975,55.649 80.416,58.09 86.208,58.09 90.475,62.357 90.475,66.192 90.247,66.42 LED2.3
NetLED2_4: LED2.4 R15.2 | length 26.1
  Top Layer w0.3: R15.2 81.836,55.014 83.185,56.363 87.401,56.363 93.753,62.714 LED2.4
NetLED3_1: LED3.1 R17.2 | length 21.9
  Top Layer w0.3: LED3.1 116.553,73.224 115.849,72.52 115.849,67.259 116.586,66.523 116.586,56.058 117.295,55.349 R17.2
NetLED3_3: LED3.3 R18.2 | length 20.5
  Top Layer w0.3: LED3.3 117.247,67.207 117.5,66.954 117.5,59.233 121.232,55.502 R18.2
NetLED3_4: LED3.4 R19.2 | length 20.6
  Top Layer w0.3: LED3.4 120.753,62.026 124.915,57.864 R19.2
NetLED4_1: LED4.1 R21.2 | length 33.5
  Top Layer w0.3: R21.2 128.217,57.122 131.242,60.147 140.233,60.147 143.739,63.652 143.739,65.735 142.824,66.65 142.824,72.72 143.328,73.224 LED4.1
NetLED4_3: LED4.3 R22.2 | length 28.5
  Top Layer w0.3: R22.2 131.366,56.614 133.299,58.547 140.284,58.547 144.551,62.814 144.551,67.158 144.247,67.462 LED4.3
NetLED4_4: LED4.4 R23.2 | length 28.2
  Top Layer w0.3: R23.2 134.744,55.372 136.37,56.998 143.078,56.998 147.753,61.672 LED4.4
NetLED5_1: LED5.1 R25.2 | length 22.7
  Top Layer w0.3: LED5.1 169.905,73.224 169.905,66.721 170.739,65.888 170.739,54.637 R25.2
NetLED5_3: LED5.3 R26.2 | length 20.7
  Top Layer w0.3: LED5.3 171.247,67.716 174.879,64.084 174.879,53.697 R26.2
NetLED5_4: LED5.4 R27.2 | length 20.6
  Top Layer w0.3: LED5.4 174.753,69.418 179.042,65.128 R27.2
NetLED6_1: LED6.1 R29.2 | length 31.8
  Top Layer w0.3: R29.2 182.852,55.928 187.071,60.147 193.802,60.147 197.637,63.983 197.637,66.827 196.85,67.615 196.85,72.822 197.252,73.224 LED6.1
NetLED6_3: LED6.3 R30.2 | length 27.9
  Top Layer w0.3: R30.2 185.824,56.868 187.935,58.979 194.132,58.979 198.577,63.424 198.577,66.827 198.247,67.157 LED6.3
NetLED6_4: LED6.4 R31.2 | length 28.2
  Top Layer w0.3: R31.2 189.126,56.03 191.135,58.039 198.247,58.039 201.753,61.545 LED6.4
NetLED7_1: LED7.1 R33.2 | length 22.8
  Top Layer w0.3: LED7.1 224.248,73.224 223.876,72.851 223.876,66.319 224.841,65.354 224.841,56.693 227.099,54.435 R33.2
NetLED7_3: LED7.3 R34.2 | length 21.1
  Top Layer w0.3: LED7.3 225.247,66.319 225.679,65.888 225.679,59.766 230.706,54.74 R34.2
NetLED7_4: LED7.4 R35.2 | length 21.4
  Top Layer w0.3: LED7.4 228.753,62.941 234.874,56.82 234.874,53.067 R35.2
NetLED8_1: LED8.1 R37.2 | length 30.8
  Top Layer w0.3: R37.2 238.529,56.741 240.64,58.852 247.244,58.852 251.739,63.348 251.739,65.735 250.977,66.497 250.977,72.532 251.669,73.224 LED8.1
NetLED8_3: LED8.3 R38.2 | length 25.8
  Top Layer w0.3: R38.2 242.11,55.801 243.357,57.048 247.244,57.048 252.781,62.586 252.781,67.615 252.247,68.148 LED8.3
NetLED8_4: LED8.4 R39.2 | length 24.6
  Top Layer w0.3: R39.2 245.717,55.446 246.202,55.931 249.022,55.931 255.753,62.662 LED8.4
NetNixie1_1: Nixie1.1 R1.2 | length 8.4
  Bottom Layer w0.6: R1.2@68.969,56.079 Nixie1.1
NetNixie2_1: Nixie2.1 R2.2 | length 8.4
  Bottom Layer w0.6: R2.2@95.969,56.079 Nixie2.1
NetNixie3_1: Nixie3.1 R3.2 | length 8.4
  Bottom Layer w0.6: R3.2@149.969,56.079 Nixie3.1
NetNixie4_1: Nixie4.1 R4.2 | length 8.4
  Bottom Layer w0.6: R4.2@122.969,56.079 Nixie4.1
NetNixie5_1: Nixie5.1 R5.2 | length 8.5
  Bottom Layer w0.6: Nixie5.1 203.969,56.079 R5.2
NetNixie6_1: Nixie6.1 R6.2 | length 8.5
  Bottom Layer w0.6: Nixie6.1 176.969,56.079 R6.2
NetNixie7_1: Nixie7.1 R7.2 | length 8.4
  Bottom Layer w0.6: R7.2@257.969,56.079 Nixie7.1
NetNixie8_1: Nixie8.1 R8.2 | length 8.4
  Bottom Layer w0.6: R8.2@230.969,56.079 Nixie8.1
NetQ1_2: Q1.2 R12.2 | length 6.4
  Top Layer w0.3: R12.2 89.027,43.003 90.805,44.78 Q1.2
NetQ1_3: Q1.3 R01.1 | length 4.4
  Bottom Layer w0.3: Q1.3@92.013,48.062 Q1.3
  Bottom Layer w0.6: Q1.3@92.013,48.062 R01.1
NetQ2_2: Q2.2 R16.2 | length 10.3
  Top Layer w0.3: Q2.2 55.73,44.313 55.997,44.045
NetQ3_2: Q3.2 R20.2 | length 13
  Top Layer w0.3: Q3.2 105.27,45.773 R20.2
NetQ4_2: Q4.2 R24.2 | length 3.9
  Top Layer w0.3: Q4.2 145.057,46.529 R24.2
NetQ4_3: Q4.3 R04.1 | length 4.3
  Bottom Layer w0.6: Q4.3@146.063,48.064 R04.1
NetQ5_2: Q5.2 R28.2 | length 12.9
  Top Layer w0.3: R28.2 159.27,45.619 Q5.2
NetQ6_2: Q6.2 R32.2 | length 3.9
  Top Layer w0.3: R32.2 198.679,42.983 Q6.2
NetQ6_3: Q6.3 R06.1 | length 4.1
  Bottom Layer w0.6: Q6.3@200.038,48.089 R06.1
NetQ7_2: Q7.2 R36.2 | length 12.6
  Top Layer w0.3: R36.2@213.27,45.085 Q7.2
NetQ8_2: Q8.2 R40.2 | length 4
  Top Layer w0.3: Q8.2 253.263,43.207 R40.2
NetQ8_3: Q8.3 R08.1 | length 4.4
  Bottom Layer w0.6: R08.1 254.038,48.495 Q8.3
OE1#: H1.4 IC1.13 IC2.13 IC3.13 IC4.13 | length 175.8
  Bottom Layer w0.6: IC1.13 80.412,110.922 119.202,110.922 123.063,114.783 130.551,114.783 IC2.13 134.387,110.947 173.634,110.947 177.648,114.96 184.374,114.96 IC3.13 188.387,110.947 229.057,110.947 232.943,114.833 238.501,114.833 IC4.13 ; IC1.13@78.664,112.758 H1.4
OE2#: H2.4 IC5.13 IC6.13 IC7.13 IC8.13 | length 180.7
  Bottom Layer w0.6: IC5.13 75.69,42.596 123.07,42.596 IC6.13 129.69,42.596 178.07,42.596 IC7.13 184.944,42.85 228.93,42.85 ; H2.4 227.838,35.966 228.96,37.088 228.96,42.82 228.93,42.85 ; IC8.13@235.034,39.286 231.47,42.85 228.93,42.85
P1: Nixie1.12 Q2.3 | length 19
  Bottom Layer w0.6: Q2.3 53.416,54.044 53.416,57.506 56.007,60.096 61.558,60.096 Nixie1.12
P2: Nixie2.12 R01.2 | length 7.5
  Bottom Layer w0.6: R01.2@91.969,56.018 Nixie2.12
P3: Nixie3.12 R04.2 | length 7.5
  Bottom Layer w0.6: R04.2@145.969,55.996 Nixie3.12
P4: Nixie4.12 Q3.3 | length 14.3
  Bottom Layer w0.6: Q3.3 111.121,59 112.801,60.681 116.143,60.681 Nixie4.12
P5: Nixie5.12 R06.2 | length 7.7
  Bottom Layer w0.6: R06.2@199.969,55.818 Nixie5.12
P6: Nixie6.12 Q5.3 | length 14.3
  Bottom Layer w0.6: Q5.3 168.462,59 Nixie6.12
P7: Nixie7.12 R08.2 | length 7.7
  Bottom Layer w0.6: R08.2@253.969,55.819 Nixie7.12
P8: Nixie8.12 Q7.3 | length 14.3
  Bottom Layer w0.6: Q7.3 222.462,59 Nixie8.12
RCK1#: H1.2 IC1.12 IC2.12 IC3.12 IC4.12 R42.1 | length 198.1
  Top Layer w0.6: R42.1 62.735,116.558 64.567,118.389 72.009,118.389 H1.2 75.866,114.532 82.978,114.532 ; IC1.12 82.978,114.532 ; IC2.12 137.998,115.552 ; IC3.12 192.092,115.646 ; IC4.12 240.228,115.646 192.092,115.646 ; 82.978,114.532 84.092,115.646 192.092,115.646
RCK2#: H2.2 IC5.12 IC6.12 IC7.12 IC8.12 R45.1 | length 196.2
  Top Layer w0.6: H2.2 234.95,31.725 244.202,31.725 R45.1
  Bottom Layer w0.6: IC5.12 75.065,34.061 118.615,34.061 IC6.12 129.192,33.934 173.488,33.934 IC7.12 184.09,34.036 221.107,34.036 224.079,31.064 231.038,31.064 232.84,32.866 IC8.12
SCK1#: H1.3 IC1.11 IC2.11 IC3.11 IC4.11 R41.1 | length 212.5
  Bottom Layer w0.6: R41.1 74.426,115.117 H1.3 78.003,118.694 90.195,118.694 92.227,116.662 ; IC1.11 87.648,116.662 92.227,116.662 ; IC2.11 141.648,116.662 ; IC3.11 195.648,116.662 ; IC4.11 241.752,116.662 195.648,116.662 ; 92.227,116.662 141.648,116.662 ; 141.648,116.662 195.648,116.662
SCK2#: H2.3 IC8.11 R011.1 R44.1 | length 41.9
  Top Layer w0.6: H2.3 233.408,30.727 246.506,30.727 R44.1
  Bottom Layer w0.6: R011.1 221.161,35.709 224.703,32.167 228.789,32.167 H2.3 ; H2.3@230.3,33.835 IC8.11
SD1#: H1.1 IC1.14 R43.1 | length 11.2
  Top Layer w0.6: R43.1@66.567,116.815 H1.1 73.381,114.478 74.316,114.478 IC1.14
SD2#: H2.1 IC8.14 R46.1 | length 14.3
  Top Layer w0.6: H2.1 241.223,33.757 R46.1
  Bottom Layer w0.6: H2.1 236.982,33.757 237.92,34.695 IC8.14
V5: H3.3 IC1.10 IC1.16 IC2.10 IC2.16 IC3.10 IC3.16 IC4.10 IC4.16 IC5.10 IC5.16 IC6.10 IC6.16 IC7.10 IC7.16 IC8.10 IC8.16 K155-1.5 K155-2.5 K155-3.5 K155-4.5 K155-5.5 K155-6.5 K155-7.5 K155-8.5 LED1.2 LED2.2 LED3.2 LED4.2 LED5.2 LED6.2 LED7.2 LED8.2 R41.2 R42.2 R43.2 R44.2 R45.2 R46.2 | length 1135.6
  Top Layer w0.3: 68.051,73.224 68.631,72.644 68.631,71.095 69.621,70.104 72.771,70.104 73.558,69.317 73.558,58.344 72.212,56.998 72.212,49.022 71.12,47.93 71.12,45.568 73.838,42.85 75.286,42.85 77.546,40.589 79.629,40.589 80,40.218 IC5.16 ; LED2.2 94.569,73.224 95.504,72.288 95.504,67.589 99.568,63.525 99.568,36.881 ; LED3.2 121.289,73.224 122.631,71.882 122.631,67.412 126.492,63.551 126.492,49.047 127.559,47.981 127.559,36.881 ; LED4.2 149.306,73.224 149.987,72.542 149.987,67.285 153.34,63.932 153.34,36.881 ; LED5.2 176.28,73.224 176.835,72.669 176.835,70.764 177.851,69.748 180.34,69.748 181.661,68.428 181.661,56.185 180.924,55.448 180.924,48.941 182.626,47.239 182.626,36.881 ; LED6.2 203.433,73.224 204.114,72.542 204.114,66.7 207.493,63.322 207.493,36.881 ; LED7.2 229.9,73.224 230.759,72.365 230.759,67.081 236.779,61.062 236.779,36.881 ; 240.595,36.881 255.473,36.881 260.02,41.427 260.02,64.897 258.064,66.853 258.064,72.441 257.281,73.224 LED8.2
  Top Layer w1: 62.131,107.073 62.131,109.8 62.741,110.41 R42.2 65.706,111.578 66.551,112.423 R43.2 ; IC5.10 62.355,36.881 ; LED1.2 68.051,73.224 ; IC1.16 69.661,112.714 66.777,109.83 ; IC5.16 77.595,36.881 ; IC1.10 86.24,111.169 87.579,109.83 ; K155-2.5 90.84,95.113 92.227,93.726 ; K155-4.5 117.84,95.266 119.38,93.726 ; IC6.10 116.355,36.881 ; IC2.16 125,111.093 126.263,109.83 ; IC6.16 131.595,36.881 ; IC2.10 140.24,110.991 141.402,109.83 ; K155-3.5 144.84,94.936 146.05,93.726 ; K155-6.5 171.84,95.241 173.355,93.726 ; IC7.10 171.355,36.881 ; IC3.16 179,110.966 180.137,109.83 ; IC7.16 186.595,36.881 ; IC3.10 194.24,111.144 195.555,109.83 ; K155-5.5 198.84,95.038 200.152,93.726 ; K155-8.5 225.84,95.343 227.457,93.726 ; IC8.10 225.355,36.881 ; IC4.16 230.116,109.83 ; IC8.16 240.595,36.881 ; IC4.10 245.356,109.83 230.116,109.83 ; K155-7.5 249.566,93.726 227.457,93.726 ; H3.3 267.284,46.965 267.284,44.526 257.839,35.081 R44.2 R45.2 R46.2 240.595,36.47 240.595,36.881 ; 62.355,36.881 77.595,36.881 ; 62.355,36.881 57.429,36.881 51.562,42.748 51.562,100.762 57.693,106.893 63.84,106.893 ; 63.84,106.893 K155-1.5 63.84,95.291 65.405,93.726 92.227,93.726 ; 63.84,106.893 66.777,109.83 ; 66.777,109.83 87.579,109.83 ; 77.595,36.881 99.568,36.881 116.355,36.881 ; 87.579,109.83 126.263,109.83 ; 92.227,93.726 119.38,93.726 ; 116.355,36.881 127.559,36.881 131.595,36.881 ; 119.38,93.726 146.05,93.726 ; 126.263,109.83 141.402,109.83 ; 131.595,36.881 153.34,36.881 171.355,36.881 ; 141.402,109.83 180.137,109.83 ; 146.05,93.726 173.355,93.726 ; 171.355,36.881 182.626,36.881 186.595,36.881 ; 173.355,93.726 200.152,93.726 ; 180.137,109.83 195.555,109.83 ; 186.595,36.881 207.493,36.881 225.355,36.881 ; 195.555,109.83 230.116,109.83 ; 200.152,93.726 227.457,93.726 ; 225.355,36.881 236.779,36.881 240.595,36.881
  Bottom Layer w1: R41.2 60.801,110.744 69.03,110.744 IC1.16
V170: C1.1 H3.1 R1.1 R2.1 R3.1 R4.1 R5.1 R6.1 R7.1 R8.1 | length 201.8
  Bottom Layer w0.6: R1.1 R2.1 R4.1 R3.1 R6.1 R5.1 R8.1 R7.1 ; C1.1@257.997,48.413 R7.1 ; H3.1@265.283,53.955 R7.1
pads on no net: H3.2 IC4.9 IC5.9

## Keep-outs
Keep-Out Layer:
  the board outline again, w0.254

## Other copper
Bottom Layer:
  text "Aeonni" at 154.635,102.057 h1.52

## Text inside footprints (layer, text, board x,y; h text height)
LED1: Top Overlay "+" at 68.048,73.529 h0.76
LED2: Top Overlay "+" at 95.048,73.529 h0.76
LED3: Top Overlay "+" at 122.048,73.529 h0.76
LED4: Top Overlay "+" at 149.048,73.529 h0.76
LED5: Top Overlay "+" at 176.048,73.529 h0.76
LED6: Top Overlay "+" at 203.048,73.529 h0.76
LED7: Top Overlay "+" at 230.048,73.529 h0.76
LED8: Top Overlay "+" at 257.048,73.529 h0.76